# Altium PCB PCB1.PcbDoc (part 5 of 9)
Units mm, origin at the board's own origin, x right, y up, seen from the top; angles counter-clockwise.
Board outline 227 x 102 mm, 4 copper layers (Top Layer, MidLayer1, MidLayer2, Bottom Layer); 425 components, 426 nets, 1455 pads, 440 vias.
Unrouted connection lines stored in the file: 2.
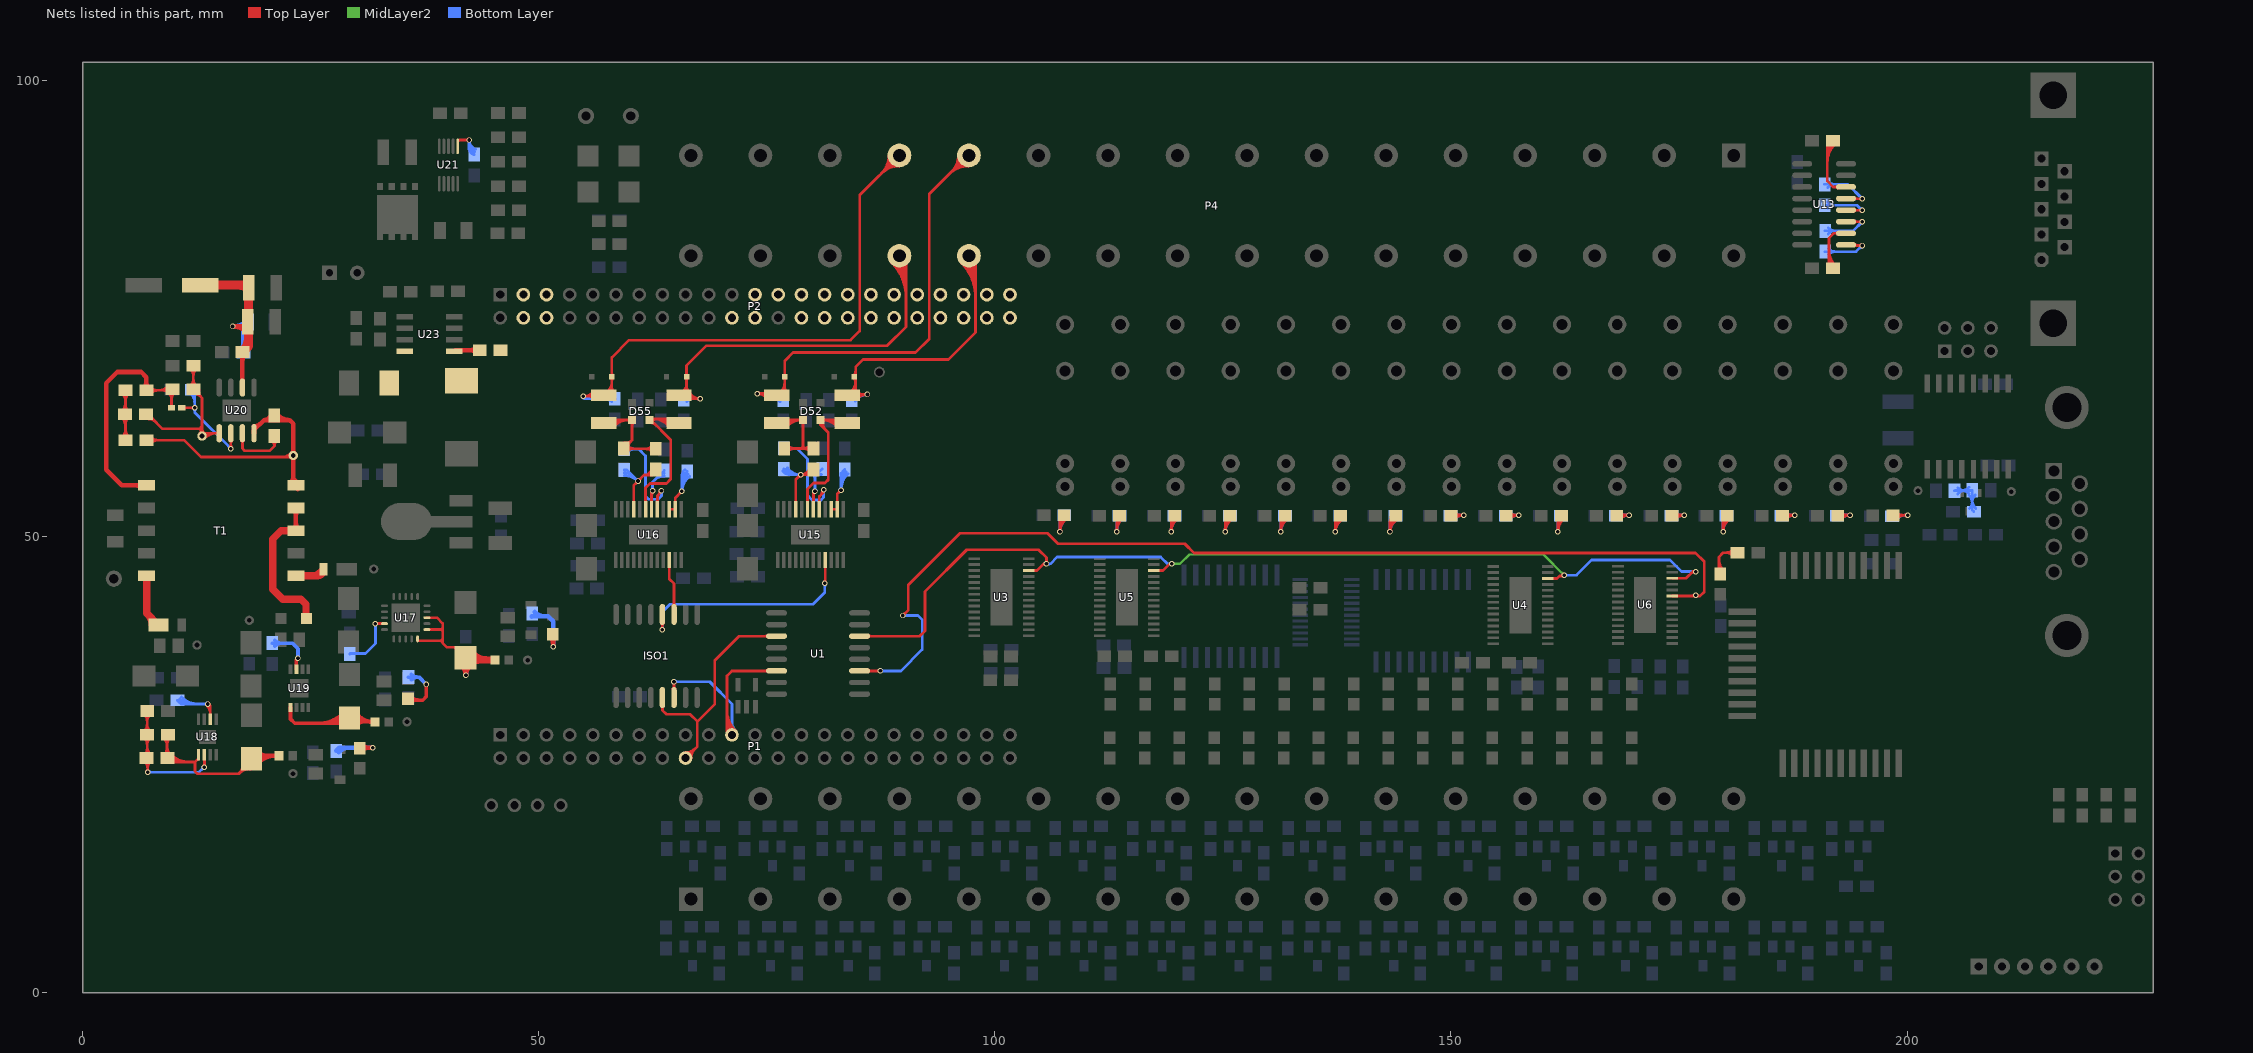
[diagram p7: the nets of this part, all layers, seen from the top]

## Via types
v1: diameter 0.6, hole 0.4, Top Layer to Bottom Layer, 427 vias
v2: diameter 0.5, hole 0.2, Top Layer to Bottom Layer, 9 vias
v3: diameter 0.66, hole 0.33, Top Layer to Bottom Layer, 4 vias

## Nets (pads, with @x,y where several pads share a name; then routed paths per layer and width w, separated by ;. In a path a pad name is that pad's centre, name@x,y a point inside that pad or via, vN(x,y) a via of type N, cw(c..) or ccw(c..) an arc to the next point about the centre after c; other vN are vias at no path point) (continued)
INPUT_LDN: U1.14 U3.26 U4.26 U5.26 U6.26 | length 117.8
  Top Layer w0.3: U1.14@84.95,39.11 91.77,39.11 92.34,39.68 92.34,44.01 96.92,48.59 104.79,48.59 105.66,47.72 v1(105.66,47.04) 105.351,47.04 ; U1.14@86.126,39.009 cw(c86.37,38.765) 86.37,39.11 ; U1.14@86.126,39.221 ccw(c86.394,39.489) 86.394,39.11 ; U3.26@103.702,46.305 104.617,46.305 105.351,47.04 ; v1@105.542,46.947 ccw(c105.351,46.798) 105.351,47.04 ; v1@105.542,47.133 cw(c105.351,47.282) 105.351,47.04 ; v1@105.554,47.146 ccw(c105.298,47.402) 105.66,47.402 ccw(c106.022,47.402) v1@105.766,47.146 ; U5.26@117.442,46.305 118.425,46.305 119.16,47.04 v1(119.4,47.04) ; U4.26@160.592,45.435 161.626,45.435 161.901,45.71 ; v1@162.283,45.894 cw(c161.901,46.198) 161.901,45.71 ; v1(162.4,45.8) 162.31,45.71 161.901,45.71 ; U6.26@174.252,45.465 175.775,45.465 176.51,46.2 ; 176.34,46.03 cw(c176.546,45.824) v1@176.727,46.052 ; v1@176.69,46.096 ccw(c176.51,45.993) 176.51,46.2 ; v1@176.82,46.2 176.51,46.2
  MidLayer2 w0.254: v1(119.4,47.04) 120.3,47.04 121.33,48.07 160.13,48.07 v1(162.4,45.8) ; v1@119.522,46.918 cw(c119.818,46.622) 119.818,47.04 cw(c119.818,47.458) v1@119.522,47.162 ; v1@162.227,45.8 ccw(c161.809,45.8) 162.105,46.095 ccw(c162.4,46.391) v1@162.4,45.973
  Bottom Layer w0.3: v1(105.66,47.04) 106.09,47.04 106.83,47.78 118.18,47.78 118.95,47.01 119.37,47.01 v1(119.4,47.04) ; v1@105.766,46.934 cw(c106.022,46.678) 106.022,47.04 cw(c106.022,47.402) v1@105.766,47.146 ; 118.965,47.01 ccw(c118.965,47.475) v1@119.294,47.146 ; v1(162.4,45.8) 163.75,45.8 165.42,47.47 174.01,47.47 175.28,46.2 v1@176.82,46.2 ; v1@162.506,45.694 cw(c162.762,45.438) 162.762,45.8 cw(c162.762,46.162) v1@162.506,45.906 ; 176.385,46.2 cw(c176.385,45.735) v1@176.714,46.064
  other v1: 176.82,46.17
INPUT_SO: U1.11 U6.23 | length 118.7
  Top Layer w0.3: U1.11@85.17,35.305 v1(87.46,35.305) ; U1.11@86.126,35.199 cw(c86.382,34.943) 86.382,35.305 cw(c86.382,35.667) U1.11@86.126,35.411 ; v1@87.354,35.199 ccw(c87.098,34.943) 87.098,35.305 ccw(c87.098,35.667) v1@87.354,35.411 ; v1(89.92,41.38) 90.52,41.98 90.52,44.75 96.16,50.39 105.79,50.39 106.94,49.24 120.82,49.24 121.82,48.24 176.8,48.24 177.77,47.27 177.77,43.98 177.305,43.515 ; v1@89.92,41.53 ccw(c89.92,41.892) 90.176,41.636 ccw(c90.432,41.38) v1@90.07,41.38 ; U6.23@174.252,43.515 177.305,43.515 ; 176.301,43.515 ccw(c176.301,44.099) v1@176.714,43.686 ; v1@176.755,43.515 v1(176.82,43.58) ; v1@176.931,43.681 ccw(c177.305,44.02) 177.305,43.515
  Bottom Layer w0.3: v1(87.46,35.305) 89.695,35.305 92.03,37.64 92.03,40.92 91.57,41.38 v1(89.92,41.38) ; v1@87.566,35.199 cw(c87.822,34.943) 87.822,35.305 cw(c87.822,35.667) v1@87.566,35.411 ; v1@90.026,41.274 cw(c90.282,41.018) 90.282,41.38 cw(c90.282,41.742) v1@90.026,41.486
LCD_DATA0: P2.45
LCD_DATA1: P2.46
LCD_DATA2: P2.43
LCD_DATA3: P2.44
LCD_DATA4: P2.41
LCD_DATA5: P2.42
LCD_DATA6: P2.39
LCD_DATA7: P2.40
LCD_DATA8: P2.37
LCD_DATA9: P2.38
LCD_DATA10: P2.36
LCD_DATA11: P2.34
LCD_DATA12: P2.35
LCD_DATA13: P2.33
LCD_DATA14: P2.31
LCD_DATA15: P2.32
LCD_DE: P2.30
LCD_HSYNC: P2.29
LCD_PCLK: P2.28
LCD_VSYNC: P2.27
MISO_AO: ISO1.11 U16.10 | length 6.8
  Top Layer w0.3: U16.10@64.313,47.464 64.313,45.397 64.835,44.875 ISO1.11@64.835,41.49 ; ISO1.11@64.729,42.446 ccw(c64.473,42.702) 64.835,42.702 ccw(c65.197,42.702) ISO1.11@64.941,42.446
MISO_DIG: ISO1.6 P1.21 U1.6 | length 36.4
  Top Layer w0.3: v1@64.724,34.014 cw(c64.468,33.758) 64.83,33.758 cw(c65.192,33.758) v1@64.936,34.014 ; ISO1.6@64.729,33.346 ccw(c64.485,33.59) 64.83,33.59 ; 64.83,33.614 ccw(c65.209,33.614) ISO1.6@64.941,33.346 ; v1(64.83,34.12) 64.83,32.395 ISO1.6@64.835,32.39 ; 70.63,28.894 ccw(c71.784,28.894) P1.21@70.968,28.078 ; 70.63,29.618 ccw(c72.508,29.618) P1.21@71.18,28.29 70.63,28.84 70.63,34.76 71.175,35.305 U1.6@76.07,35.305 ; 70.63,30.342 ccw(c73.232,30.342) P1.21@71.392,28.502 ; 70.63,31.066 ccw(c73.956,31.066) P1.21@71.604,28.714 ; U1.6@75.114,35.199 ccw(c74.858,34.943) 74.858,35.305 ccw(c74.858,35.667) U1.6@75.114,35.411
  Bottom Layer w0.3: v1(64.83,34.12) 68.75,34.12 71.18,31.69 P1.21@71.18,28.29 ; v1@64.936,34.014 cw(c65.192,33.758) 65.192,34.12 cw(c65.192,34.482) v1@64.936,34.226 ; P1.21@70.756,28.714 ccw(c69.731,29.739) 71.18,29.739 ccw(c72.629,29.739) P1.21@71.604,28.714
MMC1_DAT0: P2.25
MMC1_DAT1: P2.24
MMC1_DAT2: P2.5
MMC1_DAT3: P2.6
MMC1_DAT4: P2.23
MMC1_DAT5: P2.22
MMC1_DAT6: P2.3
MMC1_DAT7: P2.4
MOSI_AO: ISO1.12 U15.9 | length 28.7
  Top Layer w0.3: v1@63.434,39.906 ccw(c63.178,40.162) 63.54,40.162 ccw(c63.902,40.162) v1@63.646,39.906 ; ISO1.12@63.459,40.534 cw(c63.263,40.338) 63.54,40.338 ; v1(63.54,39.8) 63.54,41.465 ISO1.12@63.565,41.49 ; 63.54,40.217 cw(c63.987,40.217) ISO1.12@63.671,40.534 ; ISO1.12@63.59,41.78 ISO1.12@63.663,41.853 ; v1@81.264,45.016 ccw(c80.904,45.376) 81.413,45.376 ; v1@81.413,44.953 U15.9@81.413,47.464
  Bottom Layer w0.3: v1@63.434,39.906 ccw(c63.178,40.162) 63.54,40.162 ccw(c63.902,40.162) v1@63.646,39.906 ; v1(63.54,39.8) 63.54,41.74 64.41,42.61 80.06,42.61 81.36,43.91 81.36,44.9 v1(81.37,44.91) ; v1@81.264,44.804 cw(c81.032,44.572) 81.36,44.572 ; 81.36,44.524 cw(c81.756,44.524) v1@81.476,44.804
MOSI_DIG: ISO1.5 P1.18 U1.3 | length 29
  Top Layer w0.3: ISO1.5@63.459,31.434 cw(c63.203,31.178) 63.565,31.178 cw(c63.927,31.178) ISO1.5@63.671,31.434 ; ISO1.5@63.565,32.39 63.565,30.985 64,30.55 66.58,30.55 67.39,29.74 ; P1.18@66.1,25.75 67.39,27.04 67.39,29.74 ; P1.18@66.1,26.35 ccw(c66.1,27.799) 67.124,26.774 ccw(c68.149,25.75) P1.18@66.7,25.75 ; U1.3@75.114,39.009 ccw(c74.858,38.753) 74.858,39.115 ccw(c74.858,39.477) U1.3@75.114,39.221 ; U1.3@76.07,39.115 71.985,39.115 69.29,36.42 69.29,31.64 67.39,29.74
NetC14_1: 
NetC19_1: C19.1 R121.2 R122.2 | length 11.7
  Bottom Layer w0.3: R122.2@205.196,55.05 205.236,55.09 R121.2@207.124,55.09 207.124,52.956 C19.1@207.31,52.77 ; R122.2@205.539,54.707 cw(c206.463,53.783) 206.463,55.09 ; R122.2@205.539,55.393 ccw(c206.27,56.124) 206.27,55.09 ; R121.2@206.781,54.582 cw(c205.953,53.754) 207.124,53.754 cw(c208.295,53.754) R121.2@207.467,54.582 ; R121.2@206.781,54.747 ccw(c205.953,53.919) 205.953,55.09 ccw(c205.953,56.261) R121.2@206.781,55.433 ; C19.1@206.84,53.113 ccw(c206.155,53.798) 207.124,53.798 ; 207.124,54.083 ccw(c208.496,54.083) C19.1@207.526,53.113
NetC22_1: C22.1 U13.1 | length 9.6
  Top Layer w0.3: U13.1@193.3,82.003 193.373,81.93 v1(195.08,81.93) ; U13.1@194.206,82.109 ccw(c194.638,82.541) 194.638,81.93 ; v1@194.974,81.824 ccw(c194.718,81.568) 194.718,81.93 ccw(c194.718,82.292) v1@194.974,82.036
  Bottom Layer w0.3: C22.1@191.01,81.26 194.41,81.26 v1(195.08,81.93) ; C22.1@191.353,80.917 cw(c192.181,80.089) 192.181,81.26 cw(c192.181,82.431) C22.1@191.353,81.603 ; v1@194.93,81.93 cw(c194.568,81.93) 194.824,81.674 cw(c195.08,81.418) v1@195.08,81.78
NetC22_2: C22.2 U13.3 | length 9.8
  Top Layer w0.3: U13.3@193.3,84.543 193.303,84.54 v1(195.08,84.54) ; U13.3@194.206,84.437 cw(c194.455,84.188) 194.455,84.54 ; U13.3@194.206,84.649 ccw(c194.469,84.912) 194.469,84.54 ; v1@194.974,84.434 ccw(c194.718,84.178) 194.718,84.54 ccw(c194.718,84.902) v1@194.974,84.646
  Bottom Layer w0.3: C22.2@191.01,83.546 194.086,83.546 v1(195.08,84.54) ; C22.2@191.353,83.203 cw(c192.181,82.375) 192.181,83.546 cw(c192.181,84.717) C22.2@191.353,83.889 ; v1@194.93,84.54 cw(c194.568,84.54) 194.824,84.284 cw(c195.08,84.028) v1@195.08,84.39
NetC23_1: C23.1 U13.4 | length 9.7
  Top Layer w0.3: U13.4@193.3,85.813 193.323,85.79 v1(195.08,85.79) ; U13.4@194.206,85.707 cw(c194.407,85.506) 194.407,85.79 ; U13.4@194.206,85.919 ccw(c194.518,86.231) 194.518,85.79 ; v1@194.974,85.684 ccw(c194.718,85.428) 194.718,85.79 ccw(c194.718,86.152) v1@194.974,85.896
  Bottom Layer w0.3: C23.1@190.95,86.35 194.52,86.35 v1(195.08,85.79) ; C23.1@191.293,86.007 cw(c192.121,85.179) 192.121,86.35 cw(c192.121,87.521) C23.1@191.293,86.693 ; v1@194.93,85.79 ccw(c194.568,85.79) 194.824,86.046 ccw(c195.08,86.302) v1@195.08,85.94
NetC23_2: C23.2 U13.5 | length 10.1
  Top Layer w0.3: U13.5@193.3,87.083 193.323,87.06 v1(195.08,87.06) ; U13.5@194.206,86.977 cw(c194.407,86.776) 194.407,87.06 ; U13.5@194.206,87.189 ccw(c194.518,87.501) 194.518,87.06 ; v1@194.974,86.954 ccw(c194.718,86.698) 194.718,87.06 ccw(c194.718,87.422) v1@194.974,87.166
  Bottom Layer w0.3: C23.2@190.95,88.636 193.504,88.636 v1(195.08,87.06) ; C23.2@191.293,88.293 cw(c192.121,87.465) 192.121,88.636 cw(c192.121,89.807) C23.2@191.293,88.979 ; v1@194.93,87.06 ccw(c194.568,87.06) 194.824,87.316 ccw(c195.08,87.572) v1@195.08,87.21
NetC24_2: C24.2 U13.6 | length 12.7
  Top Layer w0.3: 191.25,91.015 cw(c194.138,91.015) C24.2@192.096,93.057 ; 191.25,91.739 cw(c193.414,91.739) C24.2@191.884,93.269 ; 191.25,92.463 cw(c192.69,92.463) C24.2@191.672,93.481 ; C24.2@191.88,93.4 191.25,92.77 191.25,88.99 191.887,88.353 U13.6@193.3,88.353 ; U13.6@192.394,88.247 ccw(c192.138,87.991) 192.138,88.353 ccw(c192.138,88.715) U13.6@192.394,88.459
NetC25_1: C25.1 U13.2 | length 9.4
  Top Layer w0.3: 191.43,80.666 ccw(c192.979,80.666) C25.1@191.884,79.571 ; 191.43,81.391 ccw(c193.704,81.391) C25.1@192.096,79.783 ; C25.1@191.78,79.19 191.43,79.54 191.43,82.76 191.943,83.273 U13.2@193.3,83.273 ; U13.2@192.394,83.167 ccw(c192.138,82.911) 192.138,83.273 ccw(c192.138,83.635) U13.2@192.394,83.379
NetC37_1: C37.1 R130.1 U15.21 | length 16.6
  Top Layer w0.3: U15.21@78.165,53.026 78.165,56.255 v1(78.71,56.8) ; v1@78.56,56.8 cw(c78.198,56.8) 78.454,56.544 cw(c78.71,56.288) v1@78.71,56.65 ; v1@78.816,56.694 cw(c79.072,56.438) 79.072,56.8 cw(c79.072,57.162) v1@78.816,56.906 ; 79.152,56.8 ccw(c79.152,57.657) R130.1@79.948,57.341 ; R130.1@79.593,56.8 ccw(c79.593,57.482) R130.1@80.227,57.231 ; R130.1@79.669,57.452 cw(c78.71,57.832) v1(78.71,56.8) ; R130.1@80.12,57.4 79.52,56.8 v1(78.71,56.8)
  Bottom Layer w0.3: C37.1@76.764,57.239 ccw(c77.586,57.789) 77.586,56.8 ; C37.1@76.86,57.43 77.49,56.8 v1(78.71,56.8) ; C37.1@77.014,57.406 ccw(c78.148,58.165) 78.148,56.8 ; C37.1@77.263,57.573 ccw(c78.71,58.541) v1(78.71,56.8) ; v1@78.604,56.694 ccw(c78.348,56.438) 78.348,56.8 ccw(c78.348,57.162) v1@78.604,56.906
NetC37_2: C37.2 U15.17 | length 15.4
  Top Layer w0.3: U15.17@80.766,53.026 80.766,54.416 81.23,54.88 v1(81.23,55.16) ; 80.906,54.556 ccw(c80.45,55.011) v1@81.083,55.132
  Bottom Layer w0.3: C37.2@76.86,59.716 76.896,59.68 78.31,59.68 79.46,58.53 79.46,54.56 79.97,54.05 80.96,54.05 81.23,54.32 v1(81.23,55.16) ; C37.2@77.203,59.373 cw(c77.944,58.632) 77.944,59.68 ; C37.2@77.203,60.059 ccw(c78.118,60.974) 78.118,59.68 ; v1@81.124,55.054 cw(c80.868,54.798) 81.23,54.798 cw(c81.592,54.798) v1@81.336,55.054
NetC38_1: C38.1 D53.1 FB1.2 P4.23 | length 69.6
  Top Layer w0.3: v1@74.076,65.594 cw(c74.332,65.338) 74.332,65.7 cw(c74.332,66.062) v1@74.076,65.806 ; 74.595,65.7 cw(c74.595,64.92) FB1.2@75.204,65.408 ; 74.602,65.7 ccw(c74.602,66.27) FB1.2@75.005,65.867 ; FB1.2@74.97,65.22 ccw(c73.97,64.418) v1(73.97,65.7) 76.07,65.7 FB1.2@76.12,65.75 ; FB1.2@76.33,65.32 76.97,65.96 76.97,69.29 77.89,70.21 91.312,70.21 92.81,71.708 92.81,87.59 P4.23@97.015,91.795 ; FB1.2@76.529,65.867 ccw(c75.465,66.931) 76.97,66.931 ; FB1.2@76.741,65.655 ccw(c76.189,66.207) 76.97,66.207 ; D53.1@76.864,67.424 cw(c76.608,67.168) 76.97,67.168 cw(c77.332,67.168) D53.1@77.076,67.424 ; D53.1@76.864,67.636 ccw(c76.608,67.892) 76.97,67.892 ccw(c77.332,67.892) D53.1@77.076,67.636 ; 76.97,66.458 ccw(c77.806,66.458) FB1.2@77.215,65.867 ; 94.97,89.75 cw(c97.167,87.553) P4.23@97.167,90.66 ; 95.301,90.081 ccw(c93.571,91.81) P4.23@96.017,91.81 ; 95.482,90.262 cw(c97.167,88.577) P4.23@97.167,90.96 ; 95.813,90.593 ccw(c94.596,91.81) P4.23@96.317,91.81 ; 95.994,90.774 cw(c97.167,89.601) P4.23@97.167,91.26
  Bottom Layer w0.3: v1(73.97,65.7) 76.12,65.7 C38.1@76.8,65.02 ; v1@74.076,65.594 cw(c74.332,65.338) 74.332,65.7 cw(c74.332,66.062) v1@74.076,65.806 ; 74.294,65.7 cw(c74.294,62.641) C38.1@76.457,64.804 ; 75.018,65.7 cw(c75.018,63.365) C38.1@76.669,65.016 ; 75.743,65.7 cw(c75.743,64.09) C38.1@76.881,65.228
NetC39_1: C39.1 U15.14 U15.15 | length 10.9
  Top Layer w0.3: U15.15@82.066,53.026 U15.14@82.716,53.026 82.716,54.682 v1(83.14,55.105) ; v1@82.99,55.105 cw(c82.628,55.105) 82.884,54.849 cw(c83.14,54.593) v1@83.14,54.955
  Bottom Layer w0.3: v1@83.034,55.211 ccw(c82.778,55.467) 83.14,55.467 ccw(c83.502,55.467) v1@83.246,55.211 ; v1@83.14,55.068 cw(c85.745,55.068) C39.1@83.903,56.91 ; v1(83.14,55.105) 83.14,56.96 C39.1@83.56,57.38 ; 83.14,55.792 cw(c85.021,55.792) C39.1@83.691,57.122 ; 83.14,56.517 cw(c84.296,56.517) C39.1@83.479,57.334
NetC40_1: C40.1 U15.18 | length 6.9
  Top Layer w0.3: U15.18@80.115,53.026 80.115,54.835 v1(80.28,55)
  Bottom Layer w0.3: v1@80.174,55.106 ccw(c79.918,55.362) 80.28,55.362 ccw(c80.642,55.362) v1@80.386,55.106 ; 80.217,56.577 cw(c80.844,55.949) C40.1@80.99,56.825 ; v1(80.28,55) 80.28,56.64 C40.1@81.07,57.43 ; 80.332,56.692 ccw(c79.721,57.303) C40.1@80.585,57.303
NetC41_1: C41.1 D54.1 P4.24 R133.2 | length 57
  Top Layer w0.3: R133.2@83.99,65.26 84.75,66.02 84.75,68.62 85.57,69.44 94.92,69.44 97.88,72.4 97.88,80.097 P4.24@97.167,80.81 ; R133.2@84.14,65.52 84.23,65.61 v1(86.04,65.61) ; R133.2@84.229,65.867 ccw(c82.971,67.125) 84.75,67.125 ; R133.2@84.441,65.655 ccw(c83.696,66.4) 84.75,66.4 ; D54.1@84.504,67.424 cw(c83.91,66.83) 84.75,66.83 ; D54.1@84.504,67.636 ccw(c83.91,68.23) 84.75,68.23 ; R133.2@84.703,65.393 cw(c85.226,64.87) 85.226,65.61 ; 84.75,66.265 ccw(c85.313,66.265) 84.915,65.867 ccw(c85.535,66.487) 85.535,65.61 ; R133.2@84.915,65.181 cw(c85.951,64.145) v1@85.951,65.61 ; v1@85.934,65.504 ccw(c85.678,65.248) 85.678,65.61 ccw(c85.678,65.972) v1@85.934,65.716 ; P4.24@96.354,79.997 cw(c92.669,76.312) 97.88,76.312 ; P4.24@96.566,80.209 cw(c93.394,77.037) 97.88,77.037 ; P4.24@96.778,80.421 cw(c94.118,77.761) 97.88,77.761 ; P4.24@96.99,80.633 cw(c94.842,78.485) 97.88,78.485 ; P4.24@97.202,80.845 cw(c95.566,79.209) 97.88,79.209
  Bottom Layer w0.3: C41.1@84.203,65.209 cw(c84.939,64.735) 84.939,65.61 ; C41.1@84.3,65.02 84.89,65.61 v1(86.04,65.61) ccw(c86.04,64.024) C41.1@84.708,64.884 ; C41.1@84.455,65.047 cw(c85.489,64.38) 85.489,65.61 ; v1@85.934,65.504 ccw(c85.678,65.248) 85.678,65.61 ccw(c85.678,65.972) v1@85.934,65.716
NetC51_1: C51.1 R135.1 U16.21 | length 14.6
  Top Layer w0.3: U16.21@60.415,53.026 60.415,55.625 61.56,56.77 ; 60.62,55.83 ccw(c60.33,56.12) v1@60.74,56.12 ; 60.668,55.878 cw(c60.89,55.656) v1@60.89,55.97 ; v1@60.89,56.27 ccw(c60.89,56.68) 61.18,56.39 ; v1@61.04,56.12 cw(c61.354,56.12) 61.132,56.342 ; 61.961,56.77 ccw(c61.961,57.501) R135.1@62.663,57.295 ; R135.1@62.362,56.77 ccw(c62.362,57.384) R135.1@62.95,57.211 ; R135.1@62.375,57.38 cw(c61.56,57.619) 61.56,56.77 ; R135.1@62.46,56.95 62.28,56.77 61.56,56.77
  Bottom Layer w0.3: C51.1@59.37,56.708 cw(c59.37,54.53) v1@60.91,56.07 ; C51.1@59.37,57.008 cw(c59.37,55.555) 60.398,56.582 ; C51.1@59.37,57.32 59.66,57.32 60.86,56.12 v1(60.89,56.12) ; 60.583,56.397 ccw(c60.89,56.705) v1@60.89,56.27 ; 60.655,56.325 cw(c60.45,56.12) v1@60.74,56.12
NetC51_2: C51.2 U16.17 | length 14.8
  Top Layer w0.3: U16.17@63.016,53.026 63.016,54.516 v1@63.515,55.015 ; 63.126,54.626 ccw(c62.682,55.07) v1@63.31,55.07
  Bottom Layer w0.3: C51.2@59.37,59.606 60.994,59.606 61.72,58.88 61.72,54.45 62.04,54.13 63.12,54.13 63.46,54.47 v1(63.46,55.07) ; C51.2@59.713,59.263 cw(c60.541,58.435) 60.541,59.606 cw(c60.541,60.777) C51.2@59.713,59.949 ; v1@63.354,54.964 cw(c63.098,54.708) 63.46,54.708 cw(c63.822,54.708) v1@63.566,54.964
NetC52_1: C52.1 D56.1 FB2.2 P4.25 | length 79
  Top Layer w0.3: v1(54.87,65.41) 56.84,65.41 FB2.2@56.89,65.46 ; v1@54.912,65.41 ccw(c54.912,66.97) FB2.2@56.015,65.867 ; v1@54.976,65.304 cw(c55.232,65.048) 55.232,65.41 cw(c55.232,65.772) v1@54.976,65.516 ; 55.462,65.41 cw(c55.462,64.628) FB2.2@56.015,65.181 ; 55.636,65.41 ccw(c55.636,66.246) FB2.2@56.227,65.655 ; FB2.2@57.539,65.867 ccw(c56.378,67.028) 58.02,67.028 ; FB2.2@57.751,65.655 ccw(c57.102,66.304) 58.02,66.304 ; FB2.2@57.8,65.52 58.02,65.74 58.02,69.68 59.9,71.56 84.19,71.56 85.18,72.55 85.18,87.443 P4.25@89.547,91.81 ; D56.1@57.914,67.424 cw(c57.658,67.168) 58.02,67.168 cw(c58.382,67.168) D56.1@58.126,67.424 ; D56.1@57.914,67.636 ccw(c57.658,67.892) 58.02,67.892 ccw(c58.382,67.892) D56.1@58.126,67.636 ; 58.02,66.362 ccw(c58.72,66.362) FB2.2@58.225,65.867 ; P4.25@88.397,91.81 cw(c85.621,91.81) 87.584,89.847 cw(c89.547,87.884) P4.25@89.547,90.66 ; P4.25@88.697,91.81 cw(c86.645,91.81) 88.096,90.359 cw(c89.547,88.908) P4.25@89.547,90.96 ; P4.25@88.997,91.81 cw(c87.669,91.81) 88.608,90.871 cw(c89.547,89.932) P4.25@89.547,91.26
  Bottom Layer w0.3: v1@54.764,65.304 ccw(c55.16,65.7) 55.16,65.14 ; v1(54.87,65.41) 55.14,65.14 C52.1@58.36,65.14 ; v1@54.976,65.516 ccw(c55.884,66.424) 55.884,65.14 ; C52.1@58.017,64.797 ccw(c57.189,63.969) 57.189,65.14 ccw(c57.189,66.311) C52.1@58.017,65.483
NetC53_1: C53.1 U16.14 U16.15 | length 12
  Top Layer w0.3: U16.15@64.316,53.026 U16.14@64.966,53.026 64.966,54.276 v1(65.7,55.01) ; v1@65.55,55.01 cw(c65.188,55.01) 65.444,54.754 cw(c65.7,54.498) v1@65.7,54.86
  Bottom Layer w0.3: v1@65.594,55.116 ccw(c65.338,55.372) 65.7,55.372 ccw(c66.062,55.372) v1@65.806,55.116 ; v1@65.7,54.928 cw(c67.808,54.928) C53.1@66.566,56.631 ; v1(65.7,55.01) 65.7,56.57 C53.1@66.28,57.15 ; 65.7,55.518 cw(c67.377,55.518) C53.1@66.389,56.874 ; 65.7,56.108 cw(c66.947,56.108) C53.1@66.212,57.116 ; C53.1@65.7,56.698 cw(c66.517,56.698) C53.1@66.035,57.358
NetC54_1: C54.1 U16.18 | length 8.4
  Top Layer w0.3: U16.18@62.365,53.026 62.365,54.935 v1(62.48,55.05) ; 62.365,54.411 cw(c63.119,54.411) v1@62.586,54.944
  Bottom Layer w0.3: v1@62.374,55.156 ccw(c62.118,55.412) 62.48,55.412 ccw(c62.842,55.412) v1@62.586,55.156 ; v1(62.48,55.05) 62.48,55.99 C54.1@63.77,57.28 ; 62.725,56.235 cw(c63.77,55.19) C54.1@63.77,56.668 ; 63.032,56.542 ccw(c62.421,57.153) C54.1@63.285,57.153 ; C54.1@63.237,56.747 cw(c63.77,56.215) C54.1@63.77,56.968
NetC55_1: C55.1 D57.1 P4.26 R137.2 | length 65.5
  Top Layer w0.3: R137.2@65.58,65.34 65.77,65.15 v1(67.7,65.15) cw(c67.7,66.507) R137.2@66.552,65.783 ; R137.2@65.799,65.867 ccw(c64.807,66.859) 66.21,66.859 ; R137.2@66.06,65.23 66.21,65.38 66.21,68.78 68.39,70.96 88.21,70.96 90.25,73 90.25,80.107 P4.26@89.547,80.81 P4.26@88.52,80.81 ; D57.1@66.104,67.424 cw(c65.848,67.168) 66.21,67.168 cw(c66.572,67.168) D57.1@66.316,67.424 ; D57.1@66.104,67.636 ccw(c65.848,67.892) 66.21,67.892 ccw(c66.572,67.892) D57.1@66.316,67.636 ; 66.21,66.531 ccw(c67.149,66.531) R137.2@66.485,65.867 ; R137.2@66.298,65.623 ccw(c67.156,66.164) 67.156,65.15 ; v1@67.594,65.044 ccw(c67.338,64.788) 67.338,65.15 ccw(c67.338,65.512) v1@67.594,65.256 ; P4.26@88.734,79.997 cw(c85.073,76.336) 90.25,76.336 ; P4.26@88.946,80.209 cw(c85.798,77.061) 90.25,77.061 ; P4.26@89.158,80.421 cw(c86.522,77.785) 90.25,77.785 ; P4.26@89.37,80.633 cw(c87.246,78.509) 90.25,78.509 ; P4.26@89.582,80.845 cw(c87.971,79.234) 90.25,79.234
  Bottom Layer w0.3: C55.1@65.9,65.06 65.99,65.15 v1(67.7,65.15) ; C55.1@66.243,64.844 cw(c66.982,64.105) 66.982,65.15 ; C55.1@66.243,65.53 ccw(c67.16,66.447) 67.16,65.15 ; v1@67.594,65.044 ccw(c67.338,64.788) 67.338,65.15 ccw(c67.338,65.512) v1@67.594,65.256
NetC59_1: C59.1 C61.2 L1.1 U17.1 U17.3 U17.20 | length 26
  Top Layer w0.3: U17.20@36.735,38.615 39.345,38.615 ; U17.1@37.75,39.84 39.3,39.84 ; U17.3@37.75,41.14 38.84,41.14 39.47,40.51 39.47,38.35 39.93,37.89 40.79,37.89 C59.1@41.22,37.46 ; 39.45,38.44 39.28,38.61 39.45,38.78 ; 39.47,39.67 39.3,39.84 ; 39.47,40.01 39.3,39.84
  Top Layer w0.5: C59.1@41.448,35.891 cw(c40.734,34.81) v1(42.03,34.81) cw(c43.452,34.81) C59.1@42.582,35.934 ; v1(42.03,34.81) C59.1@42.03,36.71
  Top Layer w0.8: C59.1@41.72,36.51 41.73,36.5 L1.1@45.22,36.5 ; C59.1@41.985,36.755 C59.1@42.03,36.71 ; C59.1@42.568,36.122 cw(c43.482,35.208) 43.482,36.5 ; C59.1@42.568,37.288 ccw(c44.472,39.192) 44.472,36.5
  Bottom Layer w0.5: C61.2@41.738,36.365 cw(c41.032,35.659) 42.03,35.659 ; C61.2@42.01,36.764 42.03,36.744 v1(42.03,34.81) ; 42.03,35.756 cw(c42.891,35.756) C61.2@42.282,36.365
NetC60_1: C60.1 U17.14 | length 6.5
  Top Layer w0.3: v1(32.1,40.49) U17.14@33.1,40.49
  Bottom Layer w0.3: C60.1@29.28,37.15 29.341,37.211 31.013,37.211 32.1,38.298 v1(32.1,40.49)
NetC62_1: C62.1 C67.2 L2.1 R140.1 U18.1 | length 36.4
  Top Layer w0.3: R140.1@8.9,27.977 cw(c8.031,27.108) 9.26,27.108 ; C62.1@8.957,26.103 ccw(c8.226,26.834) 9.26,26.834 ; 9.26,27.027 ccw(c10.567,27.027) C62.1@9.643,26.103 ; 9.26,27.19 cw(c10.373,27.19) R140.1@9.586,27.977 ; R140.1@9.26,28.66 9.26,25.8 9.75,25.31 12.34,25.31 ; C62.1@9.346,25.679 ccw(c10.236,26.569) 10.236,25.31 ; C62.1@9.558,25.891 ccw(c10.96,27.293) 10.96,25.31 ; C62.1@9.77,26.103 ccw(c11.684,28.017) 11.684,25.31 ; U18.1@12.71,26.124 12.71,25.68 12.34,25.31 ; C67.2@17.537,25.328 cw(c16.266,25.025) 17.19,24.1 cw(c18.318,22.972) C67.2@18.436,24.563 ; C67.2@17.569,24.479 ccw(c16.878,25.171) C67.2@17.829,25.398 ; C67.2@17.653,24.563 cw(c18.382,23.834) C67.2@18.458,24.862 ; C67.2@18.36,25.27 17.12,24.03 12.59,24.03 12.34,24.28 12.34,25.31
  Top Layer w0.5: C67.2@18.51,25.685 18.825,26 L2.1@21.53,26 ; C67.2@18.793,25.527 cw(c19.934,24.386) 19.934,26 ; C67.2@19.146,25.174 cw(c21.141,23.179) L2.1@21.141,26 ; C67.2@19.146,26.446 ccw(c20.224,27.524) 20.224,26 ; L2.1@21.371,25.841 ccw(c20.987,25.457) 20.987,26 ccw(c20.987,26.543) L2.1@21.371,26.159
NetC62_2: C62.2 R140.2 R141.1 U18.2 | length 25.9
  Top Layer w0.3: R140.2@6.741,27.977 cw(c5.899,27.135) 7.09,27.135 ; R140.2@6.741,28.663 ccw(c5.899,29.505) 7.09,29.505 ; R141.1@6.747,30.567 cw(c5.919,29.739) 7.09,29.739 cw(c8.261,29.739) R141.1@7.433,30.567 ; C62.2@6.798,25.417 cw(c5.973,24.592) 7.14,24.592 ; C62.2@6.798,26.103 ccw(c6.093,26.808) 7.09,26.808 ; C62.2@7.014,25.76 C62.2@7.09,25.836 ; v1@7.034,24.316 ccw(c6.778,24.572) 7.14,24.572 ccw(c7.502,24.572) v1@7.246,24.316 ; 7.09,27.054 ccw(c8.435,27.054) C62.2@7.484,26.103 ; 7.09,27.164 cw(c8.24,27.164) R140.2@7.427,27.977 ; 7.09,29.476 ccw(c8.24,29.476) R140.2@7.427,28.663 ; R141.1@7.09,30.91 C62.2@7.09,25.836 ; v1(7.14,24.21) C62.2@7.14,25.76 ; 7.14,24.587 cw(c8.314,24.587) C62.2@7.484,25.417 ; C62.2@7.14,25.786 C62.2@7.09,25.836 ; v1@13.224,24.866 ccw(c12.895,25.195) 13.36,25.195 ; v1(13.33,24.76) 13.36,24.79 U18.2@13.36,26.124
  Bottom Layer w0.3: v1(7.14,24.21) 12.78,24.21 v1(13.33,24.76) ; v1@7.246,24.104 cw(c7.502,23.848) 7.502,24.21 cw(c7.502,24.572) v1@7.246,24.316 ; v1@13.18,24.76 cw(c12.818,24.76) 13.074,24.504 cw(c13.33,24.248) v1@13.33,24.61
NetC68_1: C68.1 U18.6 | length 12.4
  Top Layer w0.3: v1@13.604,31.564 cw(c12.623,30.583) U18.6@14.01,30.583 ; v1@13.71,31.52 cw(c13.71,31.158) 13.966,31.414 cw(c14.222,31.67) v1@13.86,31.67 ; v1(13.71,31.67) 14.01,31.37 U18.6@14.01,30.026 ; v1@13.816,31.776 cw(c13.347,31.307) 14.01,31.307
  Bottom Layer w0.3: C68.1@10.39,32.09 10.81,31.67 v1(13.71,31.67) ; C68.1@10.436,32.009 ccw(c11.253,32.826) 11.253,31.67 ; C68.1@10.648,32.221 ccw(c11.978,33.551) 11.978,31.67 ; C68.1@10.86,32.433 ccw(c12.702,34.275) 12.702,31.67 ; v1@13.604,31.564 ccw(c13.348,31.308) 13.348,31.67 ccw(c13.348,32.032) v1@13.604,31.776
NetC70_1: C70.1 L3.1 U19.1 | length 24.4
  Top Layer w0.4: U19.1@22.789,31.295 22.789,30.041 23.27,29.56 29.04,29.56 C70.1@29.31,29.83 ; 25.851,29.56 ccw(c25.851,33.445) C70.1@28.598,30.698 ; 26.817,29.56 ccw(c26.817,32.479) C70.1@28.881,30.415 ; 27.783,29.56 ccw(c27.783,31.513) C70.1@29.164,30.132 ; 28.102,29.56 cw(c28.102,28.858) C70.1@28.598,29.354 ; C70.1@29.28,29.86 29.424,29.716 L3.1@32.05,29.716 cw(c32.05,32.462) C70.1@29.984,30.652 ; C70.1@29.684,30.389 ccw(c31.167,31.689) 31.167,29.716 ; C70.1@29.942,29.354 cw(c30.815,28.481) 30.815,29.716 ; L3.1@31.856,29.522 ccw(c31.386,29.052) 31.386,29.716 ccw(c31.386,30.38) L3.1@31.856,29.91
NetC73_1: C73.1 U19.7 | length 7.1
  Top Layer w0.4: U19.7@23.442,35.486 23.442,36.522 v1(23.61,36.69)
  Bottom Layer w0.4: C73.1@20.78,38.35 20.8,38.33 23.01,38.33 23.61,37.73 v1(23.61,36.69) ; C73.1@21.088,38.042 cw(c21.782,37.348) 21.782,38.33 ; C73.1@21.088,38.658 ccw(c21.878,39.448) 21.878,38.33
NetC75_1: C75.1 R143.1 T1.1 TP9.1 U20.8 | length 43.4
  Top Layer w0.3: R143.1@7,60.6 11.14,60.6 13,58.74 22.83,58.74 23.1,59.01 TP9.1@23.1,59.03 ; R143.1@7.47,60.257 cw(c8.298,59.429) 8.298,60.6 cw(c8.298,61.771) R143.1@7.47,60.943 ; U20.8@18.75,61.12 U20.8@18.75,61.8 ; C75.1@21.06,63.05 C75.1@21.16,63.15 ; 21.801,58.74 ccw(c21.801,60.219) TP9.1@22.847,59.173 ; 22.525,58.74 ccw(c22.525,59.495) TP9.1@23.059,58.961
  Top Layer w0.5: U20.8@18.795,61.36 18.795,61.705 19.89,62.8 ; U20.8@18.795,62.11 ccw(c18.795,63.088) 19.486,62.396 ; C75.1@20.671,63.333 cw(c19.89,63.639) 19.89,62.8 ; C75.1@20.943,63.118 ccw(c21.634,63.71) C75.1@21.634,62.8 ; C75.1@21.2,62.8 C75.1@21.25,62.85 ; C75.1@21.322,63.443 ccw(c22.72,64.639) 22.72,62.8 ; T1.1@22.798,55.877 ccw(c22.069,56.606) 23.1,56.606 ; T1.1@22.855,55.922 ccw(c22.569,56.37) 23.1,56.37 ; TP9.1@22.918,58.738 cw(c22.477,58.297) 23.1,58.297 cw(c23.723,58.297) TP9.1@23.282,58.738 ; TP9.1@22.918,59.102 ccw(c22.477,59.543) 23.1,59.543 ccw(c23.723,59.543) TP9.1@23.282,59.102 ; TP9.1@23.1,58.92 23.1,56.37 ; TP9.1@23.1,59.03 23.1,62.42 22.72,62.8 ; 23.109,56.361 cw(c22.666,55.918) T1.1@23.167,55.541 ; T1.1@23.516,55.954 cw(c23.13,55.568) T1.1@23.566,55.24 ; T1.1@23.55,55.92 23.1,56.37 ; 19.89,62.8 22.72,62.8 ; 23.1,56.292 ccw(c23.687,56.292) 23.272,55.877 cw(c23.687,56.292) 23.1,56.292
NetC75_2: C75.2 U20.7 | length 8.4
  Top Layer w0.3: U20.7@17.419,60.554 cw(c17.151,60.286) 17.53,60.286 ; U20.7@17.525,61.36 17.53,61.355 17.53,59.68 17.78,59.43 20.48,59.43 21.03,59.98 ; 17.53,60.31 cw(c17.875,60.31) U20.7@17.631,60.554 ; C75.2@20.753,60.509 cw(c20.387,59.98) 21.03,59.98 ; C75.2@21.03,61.034 21.03,59.98 ; C75.2@21.307,60.509 ccw(c21.673,59.98) 21.03,59.98
NetC77_1: C77.1 D65.2 R144.1 T1.10 | length 35.5
  Top Layer w0.3: C77.1@6.99,66.06 9.75,66.06 R144.1@9.86,66.17 ; C77.1@7.46,65.717 cw(c8.288,64.889) 8.288,66.06 cw(c8.288,67.231) C77.1@7.46,66.403 ; 8.297,66.06 ccw(c8.297,67.606) R144.1@9.39,66.513 ; 8.828,66.06 cw(c8.828,65.265) 9.39,65.827 cw(c8.497,64.934) 9.76,64.934 ; 9.021,66.06 ccw(c9.021,66.882) R144.1@9.602,66.301 ; D65.2@9.654,64.256 ccw(c9.398,64.512) 9.76,64.512 ccw(c10.122,64.512) D65.2@9.866,64.256 ; D65.2@9.76,64.15 R144.1@9.76,66.07 ; 9.76,65.064 cw(c10.839,65.064) R144.1@10.076,65.827
  Top Layer w0.5: T1.10@6.438,55.403 ccw(c5.866,54.831) 5.866,55.64 ccw(c5.866,56.449) T1.10@6.438,55.877 ; C77.1@6.718,66.332 ccw(c6.061,66.989) 6.99,66.989 ccw(c7.919,66.989) C77.1@7.262,66.332 ; C77.1@6.99,66.06 6.99,67.51 6.43,68.07 3.79,68.07 2.58,66.86 2.58,57.37 4.31,55.64 T1.10@7.03,55.64
NetC77_2: C77.2 C78.1 R143.2 | length 13.1
  Top Layer w0.3: C78.1@4.317,63.077 cw(c3.383,62.143) 4.704,62.143 ; C78.1@4.317,63.763 ccw(c3.383,64.697) 4.704,64.697 ; C77.2@4.361,65.717 cw(c3.533,64.889) 4.704,64.889 cw(c5.875,64.889) C77.2@5.047,65.717 ; R143.2@4.371,60.943 ccw(c3.567,61.747) 4.704,61.747 ; 4.704,61.795 ccw(c5.909,61.795) R143.2@5.057,60.943 ; 4.704,62.355 cw(c5.725,62.355) C78.1@5.003,63.077 ; 4.704,64.485 ccw(c5.725,64.485) C78.1@5.003,63.763 ; C77.2@4.704,66.06 4.704,60.426 R143.2@4.75,60.38
NetC78_2: C78.2 R144.2 R147.2 TP10.1 U20.5 | length 30.2
  Top Layer w0.3: C78.2@6.946,63.42 7.2,63.42 8.78,61.84 12.81,61.84 ; C78.2@7.073,62.935 cw(c7.073,61.457) 8.118,62.502 ; C78.2@7.073,63.235 cw(c7.073,62.482) C78.2@7.606,63.014 ; C78.2@7.558,63.42 ccw(c8.422,63.42) 7.811,62.809 ; R144.2@11.803,66.513 ccw(c10.975,67.341) 12.146,67.341 ccw(c13.317,67.341) R144.2@12.489,66.513 ; R147.2@11.803,68.427 cw(c10.975,67.599) 12.146,67.599 cw(c13.317,67.599) R147.2@12.489,68.427 ; R147.2@12.146,68.77 R144.2@12.146,66.17 13.1,65.216 TP10.1@13.1,61.05 13.41,61.36 U20.5@14.985,61.36 ; R144.2@12.273,65.685 cw(c12.273,64.821) 12.884,65.432 ; R144.2@12.754,66.108 ccw(c13.738,65.981) 13.036,65.28 ; TP10.1@12.847,61.303 ccw(c12.236,61.914) 13.1,61.914 ccw(c13.964,61.914) TP10.1@13.353,61.303 ; 12.893,61.757 cw(c12.43,61.294) TP10.1@13.045,61.07 ; 13.06,61.59 12.81,61.84 ; 13.06,62.09 12.81,61.84 ; TP10.1@13.141,61.009 cw(c13.988,60.162) 13.988,61.36 ; TP10.1@13.353,60.797 cw(c14.713,59.437) U20.5@14.713,61.36 ; U20.5@14.879,61.254 ccw(c14.623,60.998) 14.623,61.36 ccw(c14.623,61.722) U20.5@14.879,61.466
NetC80_1: C80.1 D65.1 U20.6 | length 17.7
  Top Layer w0.3: D65.1@10.86,64.15 10.87,64.14 v1(12.3,64.14) ; D65.1@11.066,64.044 cw(c11.298,63.812) 11.298,64.14 ; D65.1@11.066,64.256 ccw(c11.346,64.536) 11.346,64.14 ; v1@12.194,64.034 ccw(c11.938,63.778) 11.938,64.14 ccw(c11.938,64.502) v1@12.194,64.246 ; U20.6@16.149,60.554 cw(c15.881,60.286) 16.26,60.286 ; v1@16.154,59.776 ccw(c15.898,60.032) 16.26,60.032 ccw(c16.622,60.032) v1@16.366,59.776 ; U20.6@16.255,61.36 16.26,61.355 v1(16.26,59.67) ; 16.26,60.31 cw(c16.605,60.31) U20.6@16.361,60.554
  Bottom Layer w0.3: C80.1@11.804,65.787 cw(c10.607,64.59) 12.3,64.59 ; C80.1@12.016,65.999 cw(c11.331,65.314) 12.3,65.314 ; v1@12.194,64.034 cw(c11.938,63.778) 12.3,63.778 cw(c12.662,63.778) v1@12.406,64.034 ; v1@12.194,64.246 ccw(c11.938,64.502) 12.3,64.502 ccw(c12.662,64.502) v1@12.406,64.246 ; C80.1@12.2,65.94 12.3,65.84 12.3,63.63 v1(16.26,59.67) ; 12.3,65.328 cw(c12.949,65.328) C80.1@12.49,65.787 ; v1@16.11,59.67 ccw(c15.748,59.67) 16.004,59.926 ccw(c16.26,60.182) v1@16.26,59.82
NetC81_1: C81.1 C82.1 C83.1 L4.2 R145.1 R146.2 U20.2 | length 34.4
  Top Layer w0.5: v1(16.44,73.06) 18.136,73.06 C82.1@18.206,73.13 ; v1@16.59,73.06 cw(c16.59,71.315) C82.1@17.824,72.549 ; R146.2@17.274,69.988 cw(c16.667,69.381) 17.525,69.381 ; U20.2@17.525,66.36 17.525,70.239 R146.2@17.546,70.26 ; 17.525,69.28 cw(c18.526,69.28) R146.2@17.818,69.988
  Top Layer w1: C81.1@12.89,77.59 17.916,77.59 L4.2@18.206,77.3 C82.1@18.206,73.583 ; 17.18,77.59 cw(c17.18,76.274) L4.2@18.111,77.205 ; R146.2@17.546,70.26 18.206,70.92 C82.1@18.206,73.13 ; R146.2@17.578,70.355 ccw(c16.06,71.873) 18.206,71.873
  Bottom Layer w0.5: v1(16.44,73.06) 17.62,73.06 C83.1@18.13,73.57 ; v1@16.597,73.06 ccw(c16.597,74.828) C83.1@17.847,73.578 ; R145.1@17.358,70.472 ccw(c16.701,71.129) 17.63,71.129 ccw(c18.559,71.129) R145.1@17.902,70.472 ; R145.1@17.63,70.2 C83.1@17.63,73.07 ; 17.63,71.122 cw(c20.303,71.122) C83.1@18.413,73.012 ; 17.63,72.329 cw(c19.096,72.329) C83.1@18.059,73.366
NetC88_1: C88.1 U21.6 | length 7.6
  Top Layer w0.3: U21.6@41.17,93.35 41.32,93.5 v1(42.37,93.5) ; v1@42.264,93.394 ccw(c42.008,93.138) 42.008,93.5 ccw(c42.008,93.862) v1@42.264,93.606
  Bottom Layer w0.3: v1@42.264,93.394 cw(c42.008,93.138) 42.37,93.138 cw(c42.732,93.138) v1@42.476,93.394 ; C88.1@42.37,92.649 ccw(c43.146,92.649) C88.1@42.885,91.919 ; 42.37,93.075 ccw(c43.297,93.075) C88.1@42.986,92.201 ; C88.1@42.924,91.9 42.37,92.454 v1(42.37,93.5) ccw(c43.449,93.5) C88.1@43.087,92.484
NetC91_1: C91.1 U23.1 | length 4.8
  Top Layer w0.5: U23.1@40.73,70.324 40.866,70.46 C91.1@43.54,70.46 ; U23.1@41.365,70.288 cw(c41.78,69.874) 41.78,70.46 ; C91.1@43.141,70.188 ccw(c42.484,69.531) 42.484,70.46 ccw(c42.484,71.389) C91.1@43.141,70.732
NetC91_2: C91.2 D67.1 L5.1 U23.8
NetD35_1: D35.1 R106.2 | length 7.7
  Top Layer w0.3: D35.1@150.001,52.327 150.044,52.37 v1(151.4,52.37) ; D35.1@150.408,51.984 cw(c151.34,51.052) v1@151.34,52.37 ; D35.1@150.408,52.67 ccw(c151.133,53.394) v1@151.133,52.37 ; v1@151.294,52.264 ccw(c151.038,52.008) 151.038,52.37 ccw(c151.038,52.732) v1@151.294,52.476
  Bottom Layer w0.3: R106.2@149.955,52.327 149.998,52.37 v1(151.4,52.37) ; R106.2@150.425,51.984 cw(c151.357,51.052) v1@151.357,52.37 ; R106.2@150.425,52.67 ccw(c151.149,53.394) v1@151.149,52.37 ; v1@151.294,52.264 ccw(c151.038,52.008) 151.038,52.37 ccw(c151.038,52.732) v1@151.294,52.476
NetD36_1: D36.1 R105.2 | length 8.8
  Top Layer w0.3: D36.1@198.443,52.337 198.476,52.37 v1(200.05,52.37) ; D36.1@198.851,51.994 cw(c199.759,51.086) v1@199.759,52.37 ; D36.1@198.851,52.68 ccw(c199.599,53.428) 199.599,52.37 ; v1@199.944,52.264 ccw(c199.688,52.008) 199.688,52.37 ccw(c199.688,52.732) v1@199.944,52.476
  Bottom Layer w0.3: R105.2@198.346,52.28 198.436,52.37 v1(200.05,52.37) ; R105.2@198.604,52.149 cw(c199.137,51.616) 199.137,52.37 ; R105.2@198.816,51.937 cw(c199.861,50.892) v1@199.861,52.37 ; R105.2@198.816,52.623 ccw(c199.427,53.234) 199.427,52.37 ; v1@199.944,52.264 ccw(c199.688,52.008) 199.688,52.37 ccw(c199.688,52.732) v1@199.944,52.476
NetD37_1: D37.1 R107.2 | length 7.6
  Top Layer w0.3: D37.1@192.388,52.327 192.431,52.37 v1(193.74,52.37) ; D37.1@192.796,51.984 cw(c193.728,51.052) v1@193.728,52.37 ; D37.1@192.796,52.67 ccw(c193.52,53.394) v1@193.52,52.37 ; v1@193.634,52.264 ccw(c193.378,52.008) 193.378,52.37 ccw(c193.378,52.732) v1@193.634,52.476
  Bottom Layer w0.3: R107.2@192.297,52.327 192.34,52.37 v1(193.74,52.37) ; R107.2@192.767,51.984 cw(c193.699,51.052) v1@193.699,52.37 ; R107.2@192.767,52.67 ccw(c193.491,53.394) v1@193.491,52.37 ; v1@193.634,52.264 ccw(c193.378,52.008) 193.378,52.37 ccw(c193.378,52.732) v1@193.634,52.476
NetD38_1: D38.1 R108.2 | length 14.2
  Top Layer w0.3: v1@143.204,50.676 ccw(c142.948,50.932) 143.31,50.932 ccw(c143.672,50.932) v1@143.416,50.676 ; v1@143.31,50.48 cw(c144.969,50.48) D38.1@144.127,51.909 ; v1(143.31,50.57) 143.31,51.692 D38.1@143.945,52.327 ; 143.31,51.005 cw(c144.66,51.005) D38.1@143.974,52.168 ; 143.31,51.53 cw(c144.35,51.53) D38.1@143.822,52.426 ; D38.1@143.43,52.147 cw(c143.065,52.002) 143.343,51.724 cw(c143.678,51.388) D38.1@143.778,51.853
  Bottom Layer w0.3: v1@143.204,50.676 ccw(c142.948,50.932) 143.31,50.932 ccw(c143.672,50.932) v1@143.416,50.676 ; v1@143.31,50.508 cw(c145.035,50.508) R108.2@144.055,51.928 ; v1(143.31,50.57) 143.31,51.731 R108.2@143.906,52.327 ; 143.31,51.08 cw(c144.64,51.08) R108.2@143.884,52.175 ; 143.31,51.652 cw(c144.245,51.652) R108.2@143.714,52.422
NetD39_1: D39.1 R109.2 | length 7.9
  Top Layer w0.3: D39.1@186.333,52.327 186.376,52.37 v1(187.7,52.37) ; D39.1@186.74,51.984 cw(c187.672,51.052) v1@187.672,52.37 ; D39.1@186.74,52.67 ccw(c187.465,53.394) v1@187.465,52.37 ; v1@187.594,52.264 ccw(c187.338,52.008) 187.338,52.37 ccw(c187.338,52.732) v1@187.594,52.476
  Bottom Layer w0.3: R109.2@186.12,52.15 186.34,52.37 v1(187.7,52.37) ; R109.2@186.718,51.984 cw(c187.65,51.052) v1@187.65,52.37 ; R109.2@186.718,52.67 ccw(c187.442,53.394) v1@187.442,52.37 ; v1@187.594,52.264 ccw(c187.338,52.008) 187.338,52.37 ccw(c187.338,52.732) v1@187.594,52.476
NetD40_1: D40.1 R110.1 | length 12.7
  Top Layer w0.3: v1@137.224,50.676 ccw(c136.968,50.932) 137.33,50.932 ccw(c137.692,50.932) v1@137.436,50.676 ; v1@137.33,50.502 cw(c139.035,50.502) D40.1@138.093,51.923 ; v1(137.33,50.57) 137.33,51.767 D40.1@137.89,52.327 ; 137.33,51.061 cw(c138.664,51.061) D40.1@137.927,52.173 ; 137.33,51.619 cw(c138.294,51.619) D40.1@137.761,52.423
  Bottom Layer w0.3: v1@137.224,50.676 ccw(c136.968,50.932) 137.33,50.932 ccw(c137.692,50.932) v1@137.436,50.676 ; v1@137.33,50.525 cw(c139.121,50.525) R110.1@138.027,51.943 ; v1(137.33,50.57) 137.33,51.8 R110.1@137.857,52.327 ; 137.33,51.136 cw(c138.65,51.136) R110.1@137.843,52.181 ; R110.1@137.33,51.746 cw(c138.179,51.746) R110.1@137.66,52.418
NetD41_1: D41.1 R111.2 | length 11.1
  Top Layer w0.3: v1@179.724,50.676 ccw(c179.468,50.932) 179.83,50.932 ccw(c180.192,50.932) v1@179.936,50.676 ; v1@179.83,50.529 cw(c181.643,50.529) D41.1@180.514,51.947 ; v1(179.83,50.57) 179.83,51.88 D41.1@180.277,52.327 ; 179.83,51.151 cw(c181.148,51.151) D41.1@180.327,52.182 ; D41.1@179.83,51.773 cw(c180.653,51.773) D41.1@180.141,52.417
  Bottom Layer w0.3: v1@179.724,50.676 ccw(c179.468,50.932) 179.83,50.932 ccw(c180.192,50.932) v1@179.936,50.676 ; v1(179.83,50.57) 179.83,51.958 R111.2@180.199,52.327 ; v1(179.83,50.57) cw(c181.829,50.571) R111.2@180.415,51.984 ; 179.83,51.295 cw(c181.104,51.295) R111.2@180.203,52.196
NetD42_1: D42.1 R112.1 | length 11.3
  Top Layer w0.3: v1@131.234,50.676 ccw(c130.978,50.932) 131.34,50.932 ccw(c131.702,50.932) v1@131.446,50.676 ; v1@131.34,50.518 cw(c133.101,50.518) D42.1@132.057,51.936 ; v1(131.34,50.57) 131.34,52.04 D42.1@131.51,52.21 ; 131.34,51.112 cw(c132.664,51.112) D42.1@131.879,52.178 ; D42.1@131.34,51.705 cw(c132.227,51.705) D42.1@131.701,52.42
  Bottom Layer w0.3: v1@131.234,50.676 ccw(c130.978,50.932) 131.34,50.932 ccw(c131.702,50.932) v1@131.446,50.676 ; v1@131.34,50.537 cw(c133.206,50.537) R112.1@131.996,51.958 ; v1(131.34,50.57) 131.34,51.858 R112.1@131.809,52.327 ; 131.34,51.187 cw(c132.653,51.187) R112.1@131.802,52.186
NetD43_1: D43.1 R113.2 | length 8
  Top Layer w0.3: D43.1@173.9,52.28 173.99,52.37 v1(175.58,52.37) ; D43.1@174.63,51.984 cw(c175.562,51.052) v1@175.562,52.37 ; D43.1@174.63,52.67 ccw(c175.354,53.394) v1@175.354,52.37 ; v1@175.474,52.264 ccw(c175.218,52.008) 175.218,52.37 ccw(c175.218,52.732) v1@175.474,52.476
  Bottom Layer w0.3: R113.2@174.151,52.327 174.194,52.37 v1(175.58,52.37) ; R113.2@174.621,51.984 cw(c175.552,51.052) v1@175.552,52.37 ; R113.2@174.621,52.67 ccw(c175.345,53.394) v1@175.345,52.37 ; v1@175.474,52.264 ccw(c175.218,52.008) 175.218,52.37 ccw(c175.218,52.732) v1@175.474,52.476
NetD44_1: D44.1 R114.1 | length 12.4
  Top Layer w0.3: v1@125.154,50.676 ccw(c124.898,50.932) 125.26,50.932 ccw(c125.622,50.932) v1@125.366,50.676 ; v1@125.26,50.512 cw(c126.998,50.512) D44.1@125.994,51.931 ; v1(125.26,50.57) 125.26,51.808 D44.1@125.779,52.327 ; 125.26,51.092 cw(c126.588,51.092) D44.1@125.821,52.176 ; 125.26,51.672 cw(c126.178,51.672) D44.1@125.648,52.421
  Bottom Layer w0.3: v1@125.154,50.676 ccw(c124.898,50.932) 125.26,50.932 ccw(c125.622,50.932) v1@125.366,50.676 ; v1@125.26,50.531 cw(c127.084,50.531) R114.1@125.938,51.95 ; v1(125.26,50.57) 125.26,51.827 R114.1@125.76,52.327 ; 125.26,51.159 cw(c126.577,51.159) R114.1@125.749,52.183 ; R114.1@125.26,51.787 cw(c126.069,51.787) R114.1@125.56,52.416
NetD45_1: D45.1 R115.2 | length 7.6
  Top Layer w0.3: D45.1@168.167,52.327 168.21,52.37 v1(169.52,52.37) ; D45.1@168.574,51.984 cw(c169.506,51.052) v1@169.506,52.37 ; D45.1@168.574,52.67 ccw(c169.299,53.394) v1@169.299,52.37 ; v1@169.414,52.264 ccw(c169.158,52.008) 169.158,52.37 ccw(c169.158,52.732) v1@169.414,52.476
  Bottom Layer w0.3: R115.2@168.102,52.327 168.145,52.37 v1(169.52,52.37) ; R115.2@168.572,51.984 cw(c169.503,51.052) v1@169.503,52.37 ; R115.2@168.572,52.67 ccw(c169.296,53.394) v1@169.296,52.37 ; v1@169.414,52.264 ccw(c169.158,52.008) 169.158,52.37 ccw(c169.158,52.732) v1@169.414,52.476
NetD46_1: D46.1 R116.1 | length 10.1
  Top Layer w0.3: v1@119.234,50.676 ccw(c118.978,50.932) 119.34,50.932 ccw(c119.702,50.932) v1@119.446,50.676 ; v1@119.34,50.541 cw(c121.24,50.541) D46.1@119.98,51.964 ; v1(119.34,50.57) 119.34,51.96 D46.1@119.57,52.19 ; 119.34,51.208 cw(c120.65,51.208) D46.1@119.782,52.189
  Bottom Layer w0.3: v1@119.234,50.676 ccw(c118.978,50.932) 119.34,50.932 ccw(c119.702,50.932) v1@119.446,50.676 ; v1@119.34,50.567 cw(c121.344,50.567) R116.1@119.927,51.984 ; v1(119.34,50.57) 119.34,51.956 R116.1@119.711,52.327 ; 119.34,51.292 cw(c120.619,51.292) R116.1@119.715,52.196
NetD47_1: D47.1 R117.2 | length 10.4
  Top Layer w0.3: v1@161.614,50.676 ccw(c161.358,50.932) 161.72,50.932 ccw(c162.082,50.932) v1@161.826,50.676 ; v1@161.72,50.54 cw(c163.609,50.54) D47.1@162.365,51.962 ; v1(161.72,50.57) 161.72,51.936 D47.1@162.111,52.327 ; 161.72,51.201 cw(c163.031,51.201) D47.1@162.168,52.188
  Bottom Layer w0.3: R117.2@161.583,51.984 cw(c161.252,51.653) 161.72,51.653 ; v1@161.614,50.676 ccw(c161.358,50.932) 161.72,50.932 ccw(c162.082,50.932) v1@161.826,50.676 ; v1(161.72,50.57) 161.72,51.994 R117.2@162.053,52.327 ; v1@161.72,50.659 cw(c163.594,50.659) R117.2@162.269,51.984 ; 161.72,51.383 cw(c162.869,51.383) R117.2@162.057,52.196
NetD48_1: D48.1 R118.1 | length 10.2
  Top Layer w0.3: D48.1@113.261,51.984 cw(c112.996,51.72) D48.1@113.37,51.72 ; v1@113.264,50.676 ccw(c113.008,50.932) 113.37,50.932 ccw(c113.732,50.932) v1@113.476,50.676 ; v1(113.37,50.57) 113.37,52.028 D48.1@113.669,52.327 ; v1@113.37,50.592 cw(c115.338,50.592) D48.1@113.946,51.984 ; 113.37,51.317 cw(c114.614,51.317) D48.1@113.734,52.196
  Bottom Layer w0.3: R118.1@113.192,51.984 cw(c112.763,51.555) 113.37,51.555 ; v1@113.264,50.676 ccw(c113.008,50.932) 113.37,50.932 ccw(c113.732,50.932) v1@113.476,50.676 ; v1(113.37,50.57) 113.37,52.19 R118.1@113.44,52.26 ; v1@113.37,50.758 cw(c115.104,50.758) R118.1@113.878,51.984 ; 113.37,51.482 cw(c114.38,51.482) R118.1@113.666,52.196
NetD49_1: D49.1 R119.2 | length 7.7
  Top Layer w0.3: D49.1@156.056,52.327 156.099,52.37 v1(157.43,52.37) ; D49.1@156.464,51.984 cw(c157.396,51.052) v1@157.396,52.37 ; D49.1@156.464,52.67 ccw(c157.188,53.394) v1@157.188,52.37 ; v1@157.324,52.264 ccw(c157.068,52.008) 157.068,52.37 ccw(c157.068,52.732) v1@157.324,52.476
  Bottom Layer w0.3: R119.2@156.004,52.327 156.047,52.37 v1(157.43,52.37) ; R119.2@156.474,51.984 cw(c157.406,51.052) v1@157.406,52.37 ; R119.2@156.474,52.67 ccw(c157.198,53.394) v1@157.198,52.37 ; v1@157.324,52.264 ccw(c157.068,52.008) 157.068,52.37 ccw(c157.068,52.732) v1@157.324,52.476
NetD50_1: D50.1 R120.1 | length 11.7
  Top Layer w0.3: v1@107.034,50.676 ccw(c106.778,50.932) 107.14,50.932 ccw(c107.502,50.932) v1@107.246,50.676 ; v1@107.14,50.525 cw(c109.023,50.525) D50.1@107.85,51.998 ; v1(107.14,50.57) 107.14,51.904 D50.1@107.613,52.377 ; 107.14,51.147 cw(c108.527,51.147) D50.1@107.663,52.232 ; D50.1@107.14,51.769 cw(c108.032,51.769) D50.1@107.477,52.467
  Bottom Layer w0.3: v1@107.034,50.676 ccw(c106.778,50.932) 107.14,50.932 ccw(c107.502,50.932) v1@107.246,50.676 ; v1@107.14,50.537 cw(c109.107,50.537) R120.1@107.807,52.013 ; v1(107.14,50.57) 107.14,51.904 R120.1@107.613,52.377 ; 107.14,51.201 cw(c108.522,51.201) R120.1@107.608,52.238
NetD51_2: D51.2 R128.2 | length 8.6
  Top Layer w0.3: D51.2@179.174,46.335 ccw(c178.701,46.808) 179.37,46.808 ; 179.37,46.793 ccw(c180.319,46.793) D51.2@179.648,46.123 ; 179.37,47.518 ccw(c181.043,47.518) D51.2@179.86,46.335 ; D51.2@179.517,45.927 179.37,46.074 179.37,47.8 179.83,48.26 R128.2@181.394,48.26 ; R128.2@180.924,47.917 ccw(c180.096,47.089) 180.096,48.26 ccw(c180.096,49.431) R128.2@180.924,48.603
NetD52_2: D52.2 FB1.1 R129.2 R130.2 | length 18.5
  Top Layer w0.3: FB1.1@76.11,62.476 76.434,62.8 D52.2@78.98,62.8 78.98,59.886 ; R129.2@76.92,59.676 80.11,59.676 R130.2@80.12,59.686 ; FB1.1@77.003,62.345 cw(c78.101,61.247) 78.101,62.8 ; FB1.1@77.215,62.133 cw(c78.825,60.523) D52.2@78.825,62.8 ; R129.2@77.263,59.333 cw(c78.091,58.505) 78.091,59.676 cw(c78.091,60.847) R129.2@77.263,60.019 ; 78.77,59.676 78.98,59.886 ; D52.2@78.786,62.994 cw(c78.316,63.464) 78.316,62.8 cw(c78.316,62.136) 78.786,62.606 cw(c78.316,62.136) 78.98,62.136 cw(c79.644,62.136) D52.2@79.174,62.606 ; 78.925,59.676 ccw(c78.925,60.881) R130.2@79.777,60.029 ; 78.973,59.676 cw(c78.973,58.539) R130.2@79.777,59.343 ; 79.19,59.676 78.98,59.886
NetD52_3: D52.3 R133.1 U15.19 | length 22.3
  Top Layer w0.3: U15.19@79.465,53.026 79.465,55.255 80.12,55.91 81.39,55.91 81.74,56.26 81.74,61.42 80.88,62.28 ; D52.3@80.855,62.805 ccw(c81.651,62.654) 81.079,62.081 ; D52.3@81.074,62.606 cw(c81.544,62.136) 81.544,62.8 cw(c81.544,63.464) D52.3@81.074,62.994 ; D52.3@81.095,62.8 cw(c81.095,60.523) R133.1@82.705,62.133 ; D52.3@81.15,62.749 ccw(c82.326,62.526) 81.48,61.68 ; 81.819,62.8 cw(c81.819,61.247) R133.1@82.917,62.345 ; R133.1@83.81,62.476 83.486,62.8 D52.3@80.88,62.8 80.88,62.28 ; 80.88,62.28 ccw(c80.526,62.28) 80.725,62.573 cw(c80.526,62.28) 80.88,62.28 ; 80.88,62.28 cw(c81.234,62.28) 81.035,62.573 ccw(c81.234,62.28) 80.88,62.28
NetD55_2: D55.2 FB2.1 R134.2 R135.2 | length 20.7
  Top Layer w0.3: FB2.1@57.12,62.476 57.444,62.8 D55.2@60.24,62.8 60.24,60.596 ; FB2.1@58.013,62.345 cw(c59.111,61.247) 59.111,62.8 ; FB2.1@58.225,62.133 cw(c59.835,60.523) D55.2@59.835,62.8 ; R134.2@59.383,60.295 ccw(c59.498,61.338) 60.24,60.596 ; R134.2@59.673,59.343 cw(c60.428,58.588) 60.428,59.656 ; R134.2@59.673,60.029 ccw(c60.573,60.929) 60.573,59.656 ; R134.2@59.815,59.813 cw(c60.679,59.813) 60.068,60.424 ; D55.2@60.046,62.994 cw(c59.576,63.464) 59.576,62.8 cw(c59.576,62.136) 60.046,62.606 cw(c59.576,62.136) 60.24,62.136 cw(c60.904,62.136) D55.2@60.434,62.606 ; R135.2@62.497,59.313 ccw(c61.669,58.485) 61.669,59.656 ccw(c61.669,60.827) R135.2@62.497,59.999 ; R135.2@62.84,59.656 59.36,59.656 R134.2@59.33,59.686 60.24,60.596
NetD55_3: D55.3 R137.1 U16.19 | length 22.6
  Top Layer w0.3: U16.19@61.715,53.026 61.715,55.385 62.19,55.86 64,55.86 64.48,56.34 64.48,60.61 62.29,62.8 D55.3@62.14,62.8 D55.3@62.464,62.956 ; D55.3@62.14,62.525 cw(c62.14,61.499) 62.866,62.224 ; D55.3@62.334,62.606 cw(c63.181,61.759) 63.181,62.956 ; 63.134,62.956 cw(c63.134,61.152) R137.1@64.48,62.353 ; 63.803,62.956 cw(c63.803,61.749) R137.1@64.704,62.553 ; R137.1@64.256,62.153 ccw(c62.464,60.555) D55.3@62.464,62.956 ; R137.1@65.38,62.956 D55.3@62.464,62.956
NetD59_2: D59.2 R138.2 | length 9.5
  Top Layer w0.5: D59.2@51.281,38.986 cw(c50.558,38.264) 51.58,38.264 ; D59.2@51.553,39.323 51.58,39.296 v1(51.58,37.94) ; 51.58,38.394 cw(c52.417,38.394) D59.2@51.825,38.986
  Bottom Layer w0.5: R138.2@49.22,41.25 49.26,41.29 51.02,41.29 51.58,40.73 v1(51.58,37.94) ; R138.2@49.552,41.761 ccw(c50.69,42.899) 50.69,41.29
NetD61_1: D61.1 R139.2 | length 8.4
  Top Layer w0.5: D61.1@30.383,26.833 30.43,26.88 v1(31.82,26.88) ; D61.1@30.655,26.626 cw(c31.269,26.013) 31.269,26.88 ; D61.1@30.655,27.17 ccw(c31.356,27.872) 31.356,26.88
  Bottom Layer w0.5: R139.2@27.79,26.546 28.124,26.88 v1(31.82,26.88) ; R139.2@28.062,26.401 cw(c29.219,25.244) 29.219,26.88
NetD62_2: D62.2 R142.2 | length 9.1
  Top Layer w0.4: D62.2@35.673,32.253 35.826,32.1 37.28,32.1 37.68,32.5 v1(37.68,33.82) ; D62.2@35.981,31.881 cw(c36.51,31.351) 36.51,32.1 ; D62.2@35.981,32.496 ccw(c36.936,33.451) 36.936,32.1
  Bottom Layer w0.4: R142.2@35.73,34.626 36.874,34.626 v1(37.68,33.82) ; R142.2@36.038,34.318 cw(c36.78,33.576) 36.78,34.626 cw(c36.78,35.676) R142.2@36.038,34.934
NetD63_2: D63.2 T1.5 | length 6.2
  Top Layer w0.8: T1.5@23.39,45.72 25.685,45.72 ; 25.135,45.72 ccw(c25.135,47.48) D63.2@26.38,46.235 ; 25.903,45.938 cw(c26.415,45.426) D63.2@26.415,46.15 ; D63.2@26.367,46.215 cw(c25.685,46.438) 25.685,45.72 ; D63.2@26.415,46.45 25.685,45.72
NetD64_2: D64.2 T1.2 T1.3 | length 19.9
  Top Layer w0.5: T1.3@23.153,50.917 ccw(c22.581,51.489) 23.39,51.489 ccw(c24.199,51.489) T1.3@23.627,50.917 ; T1.2@23.153,52.923 cw(c22.581,52.351) 23.39,52.351 cw(c24.199,52.351) T1.2@23.627,52.923 ; T1.3@23.39,50.68 T1.2@23.39,53.16
  Top Layer w0.8: T1.3@23.39,50.68 21.76,50.68 20.84,49.76 20.84,44.24 21.93,43.15 23.95,43.15 24.5,42.6 24.5,41.09 D64.2@24.55,41.04 ; 24.5,41.644 ccw(c25.154,41.644) D64.2@24.691,41.181
NetD66_1: D66.1 T1.6 | length 7.3
  Top Layer w0.8: T1.6@7.03,45.72 7.03,41.625 D66.1@8.325,40.33 ; 7.13,41.525 cw(c5.935,40.33) D66.1@7.625,40.33